# Altium PCB sitara_rev1.PcbDoc
Units mil, origin at the board's own origin, x right, y up, seen from the top; angles counter-clockwise.
Board outline 2000 x 2000 mil, 4 copper layers (Top Layer, Internal Plane 1, Internal Plane 2, Bottom Layer), stack 63.387 mil thick; 104 components, 76 nets, 374 pads, 326 vias.
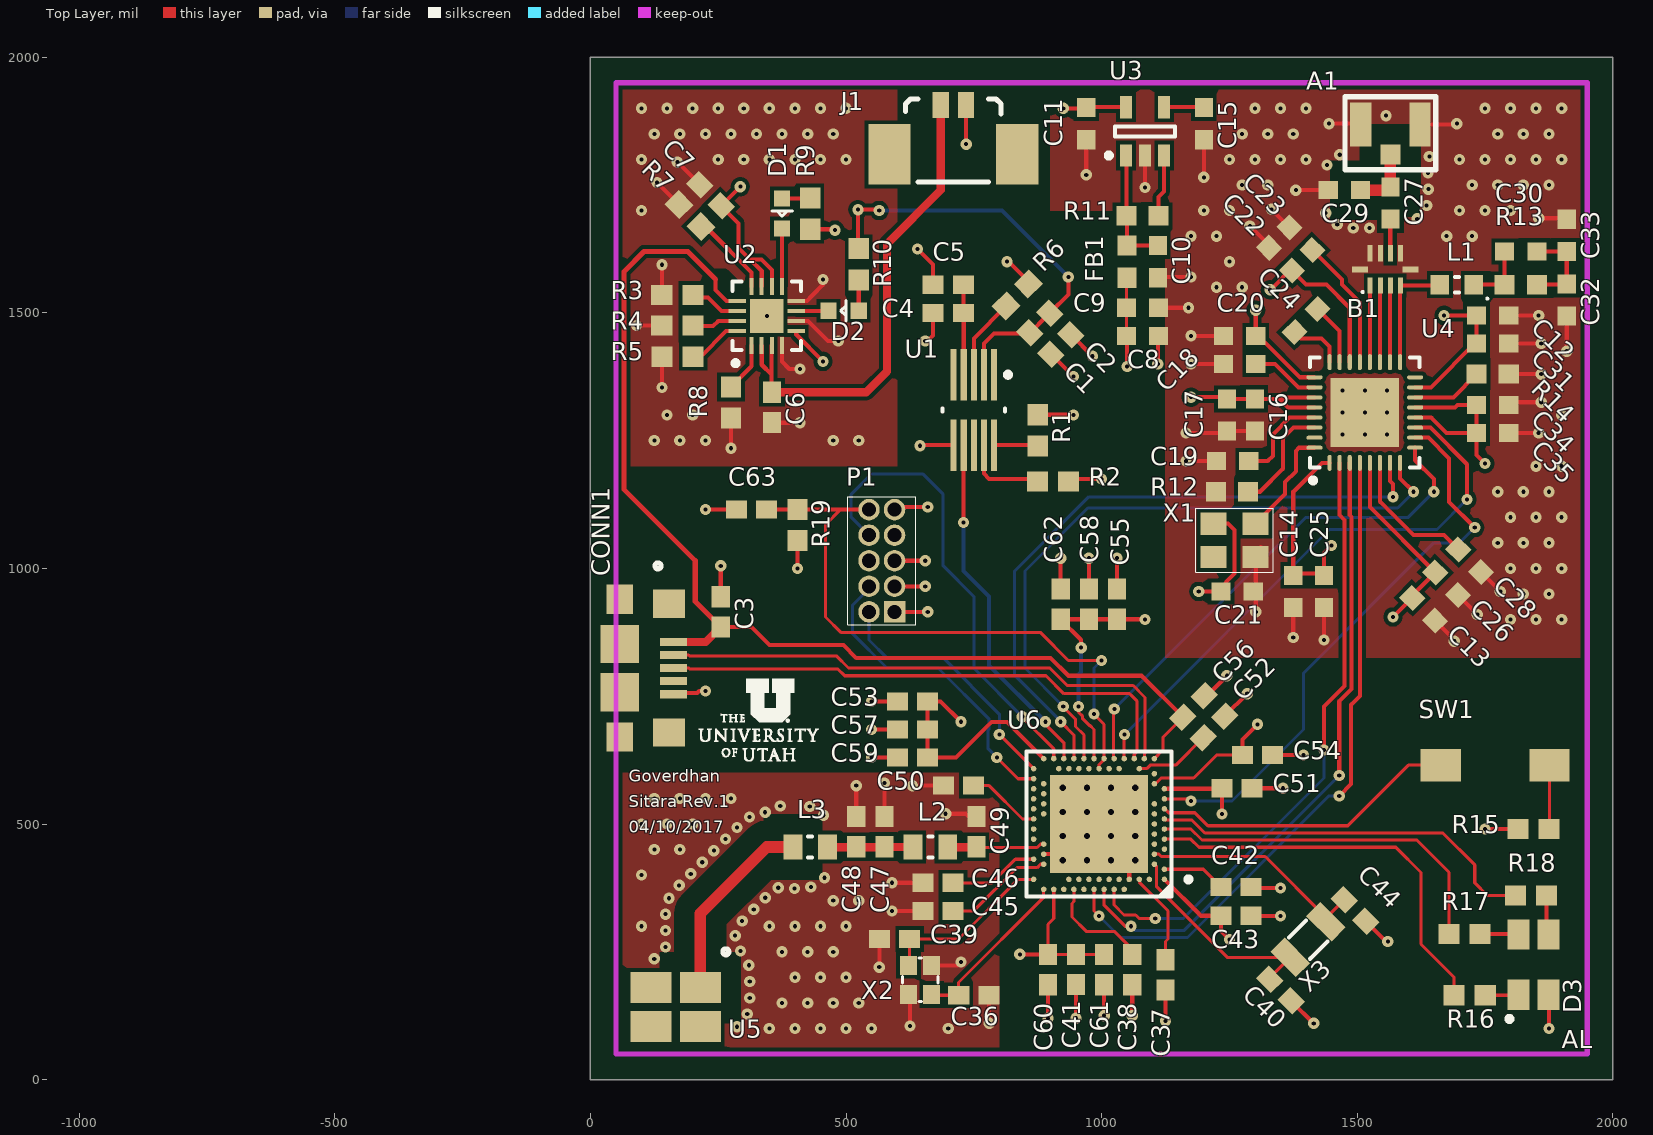
[diagram p0: Top Layer view]
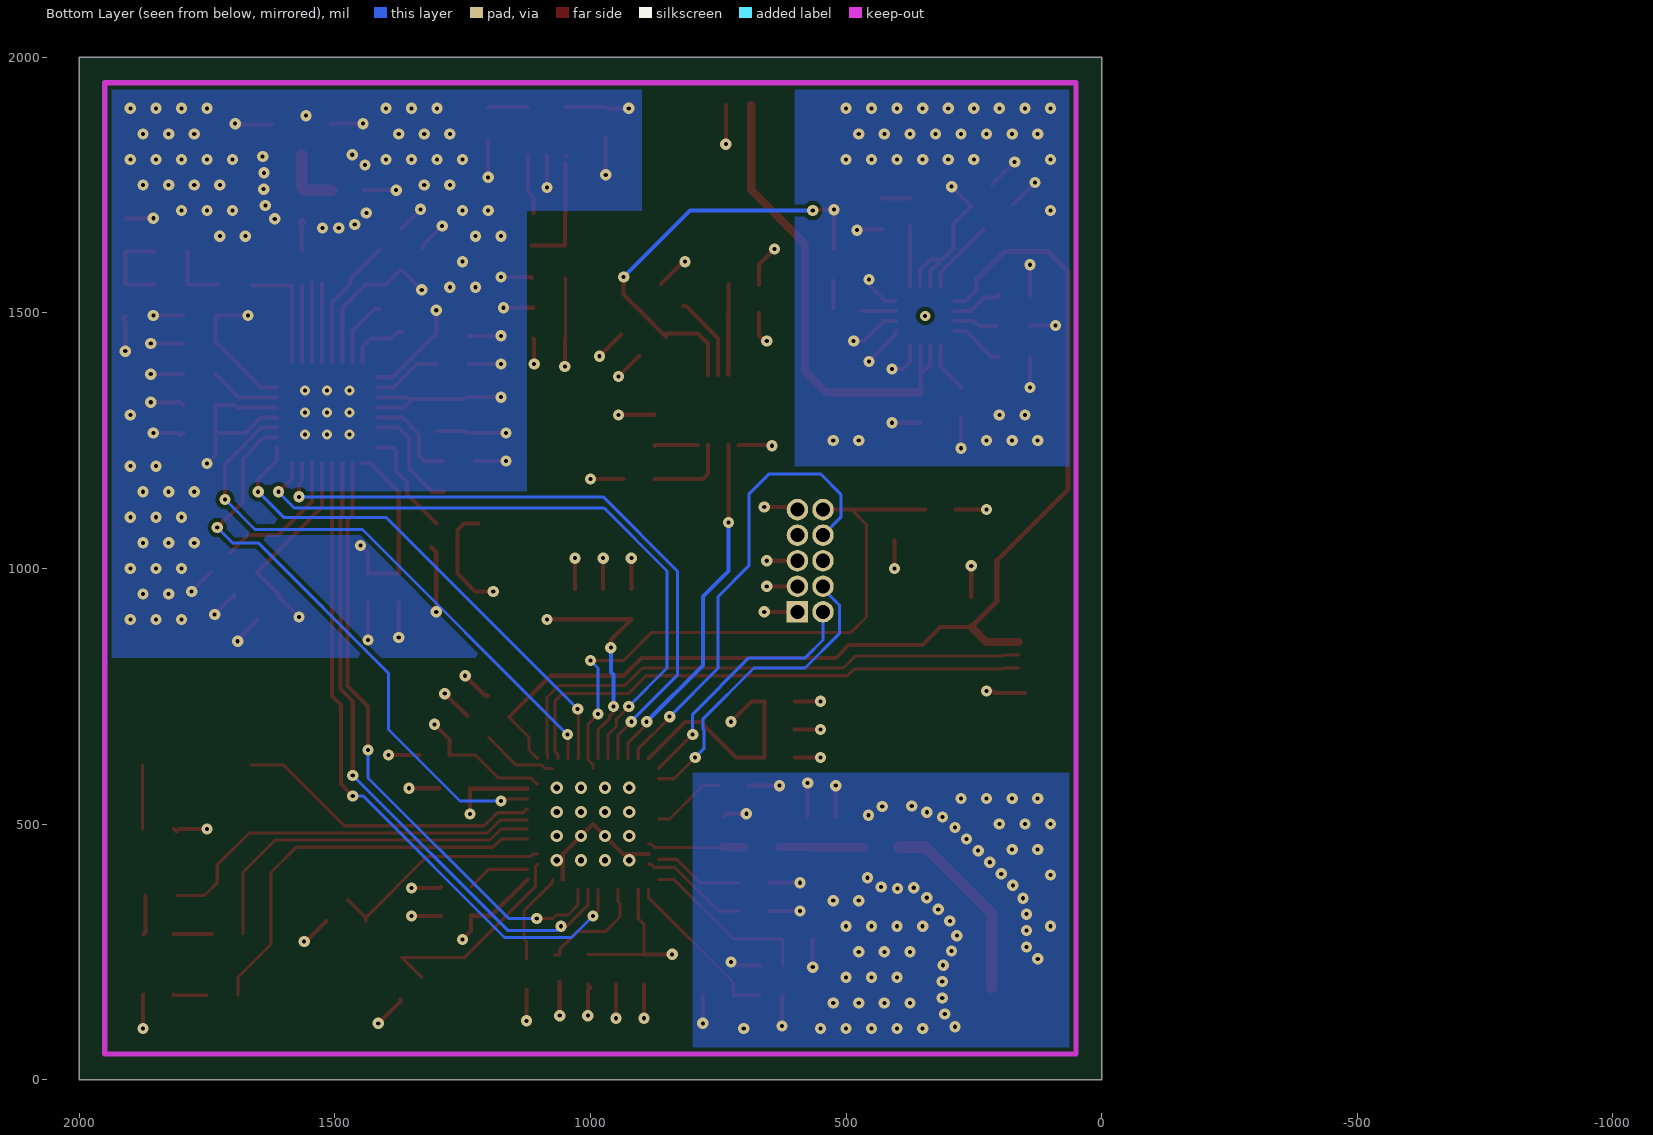
[diagram p1: Bottom Layer view, seen from below]
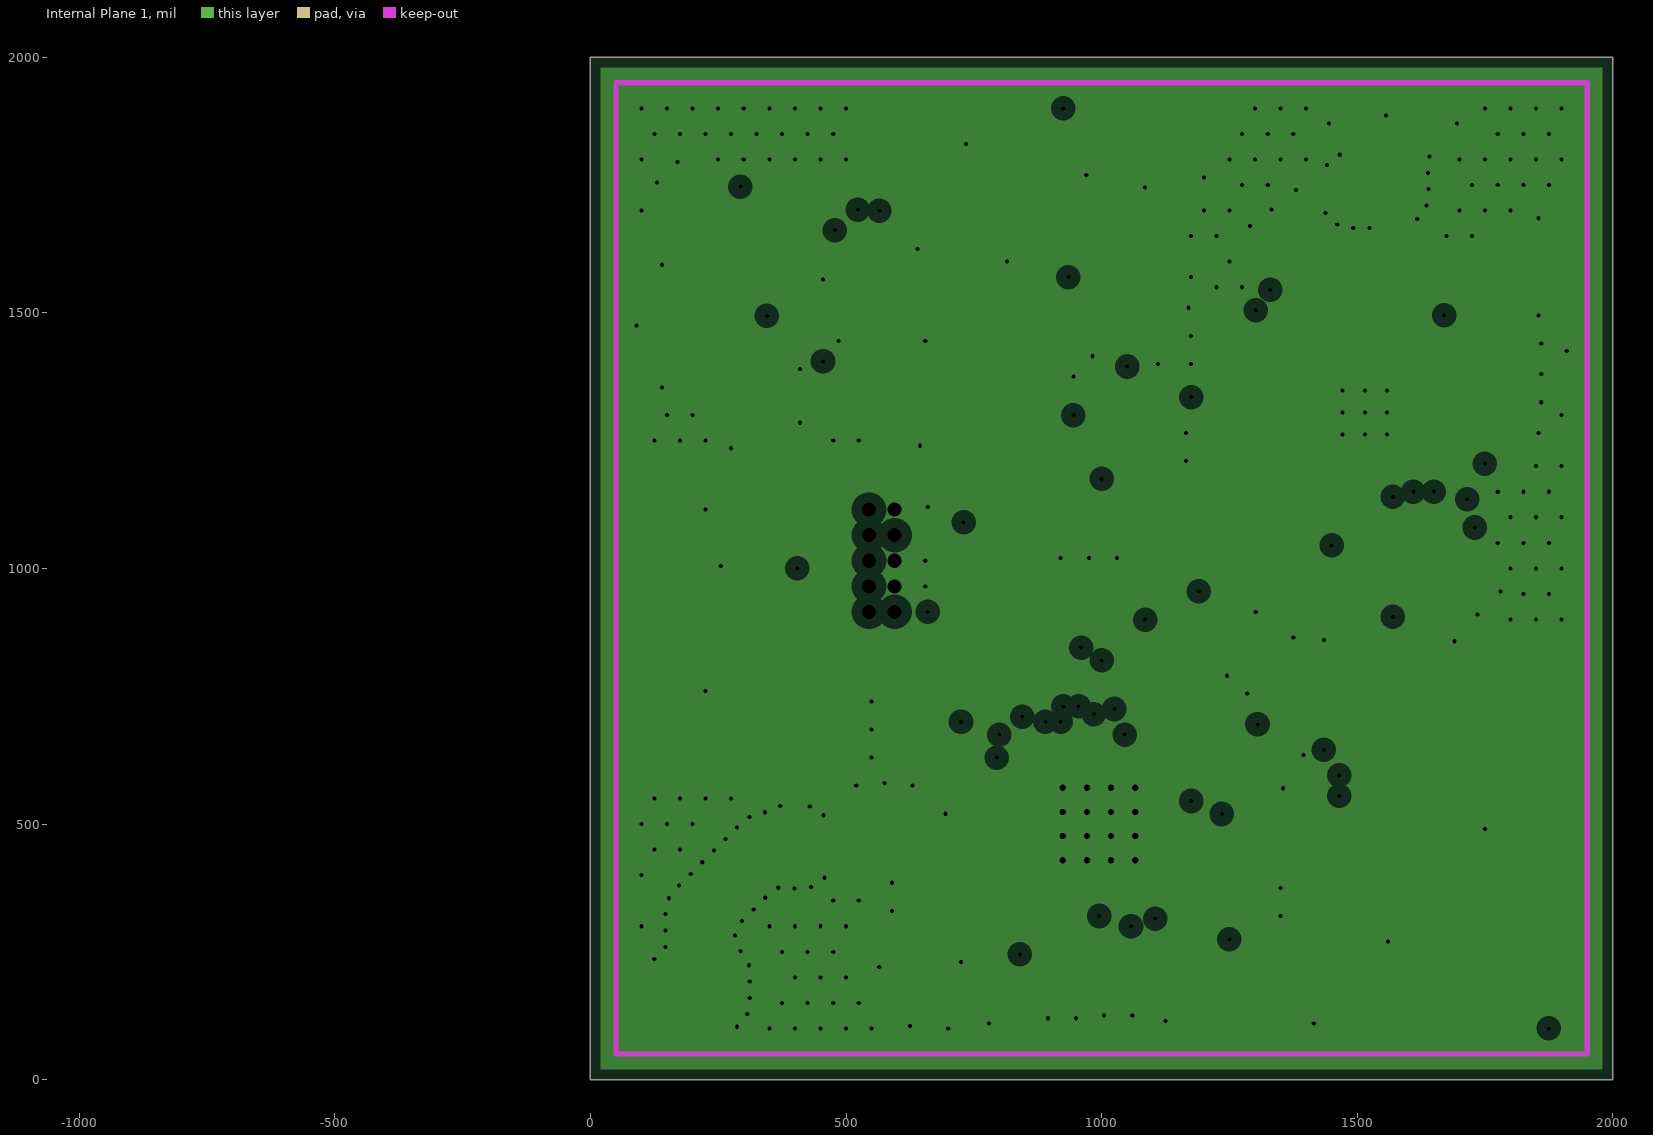
[diagram p2: Internal Plane 1, clearances drawn from the general rule]
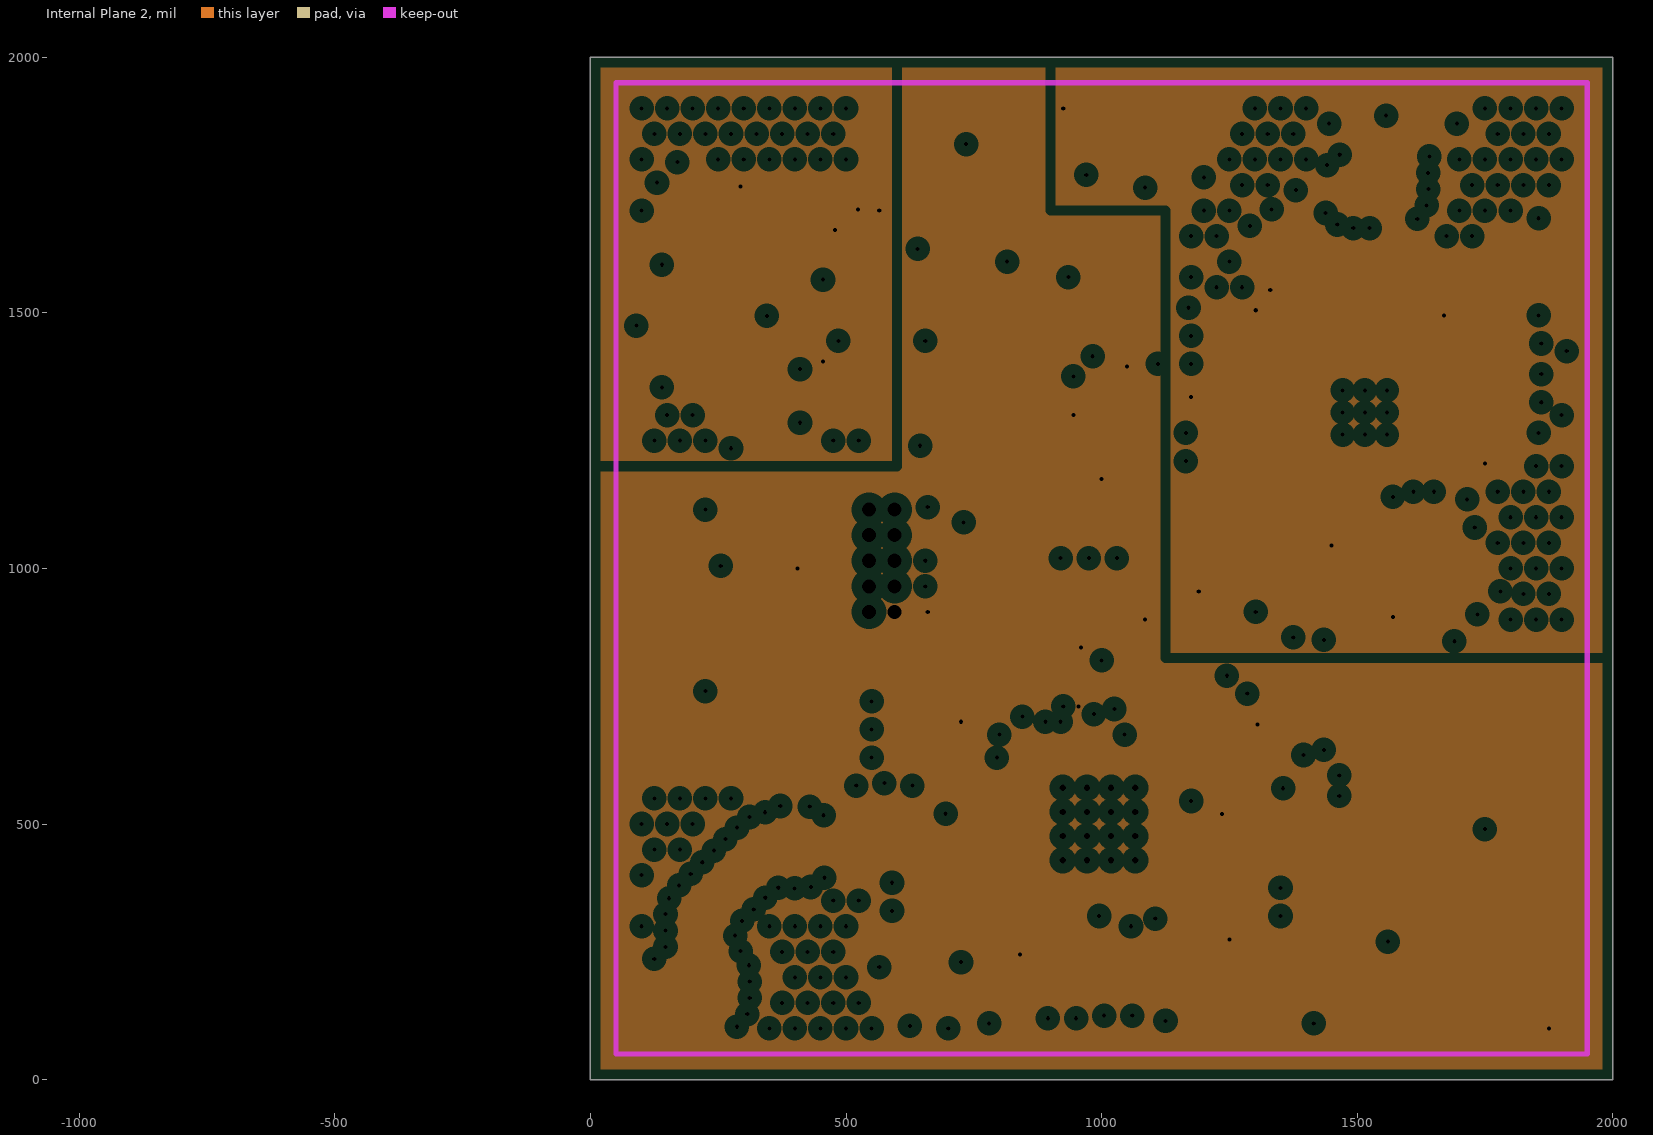
[diagram p3: Internal Plane 2, clearances drawn from the general rule]

## Layer stack, top to bottom
Top Solder: solder mask 0.039, Solder Resist, Dk 3.5
Top Layer: signal copper 1.378
Dielectric1: prepreg 14.961, ML 4, Dk 4.2
Internal Plane 1: plane copper 1.378, net GND
Dielectric2: prepreg 27.953, ML 4, Dk 4.2
Internal Plane 2: plane copper 1.378, net VDD
Dielectric3: prepreg 14.961, ML 4, Dk 4.2
Bottom Layer: signal copper 1.378
Bottom Solder: solder mask 0.039, Solder Resist, Dk 3.5

## Board outline
0,0 2000,0 2000,2000 0,2000

## Design rules (kind name [scope] priority, off if disabled: settings)
Clearance Shielding [InPolygon vs InNetClass('RF')] p1: gap=40 ignorepadtopadclearanceinfootprint=FALSE except(0: Arc-Hole Track-Hole SMDPad-Hole THPad-Hole Via-Hole Fill-Hole Poly-Hole Region-Hole Text-Hole)
Clearance [All] p2: gap=8 ignorepadtopadclearanceinfootprint=FALSE except(0: Arc-Hole Track-Hole SMDPad-Hole THPad-Hole Via-Hole Fill-Hole Poly-Hole Region-Hole Text-Hole; 6: Arc-SMDPad Track-SMDPad SMDPad-SMDPad)
DiffPairsRouting [All] p1: maxlimit=10 minlimit=10 mostfreqgap=10 toplayer_minwidth=6 toplayer_maxwidth=15 toplayer_prefwidth=15 bottomlayer_minwidth=6 bottomlayer_maxwidth=15 bottomlayer_prefwidth=15 maxuncoupledlength=500
PlaneClearance [All] p1: clearance=20
PlaneConnect [All] p1: planeconnectstyle=Direct reliefexpansion=20 reliefentries=4 reliefconductorwidth=10 reliefairgap=10
PolygonConnect Stitch [IsPolygon vs InNet('GND')] p1: connectstyle=Direct reliefconductorwidth=10 reliefentries=4 polygonreliefangle="90 Angle" airgapwidth=10
PolygonConnect [All] p2: connectstyle=Relief reliefconductorwidth=10 reliefentries=4 polygonreliefangle="90 Angle" airgapwidth=10
RoutingVias [All] p1: holewidth=12 width=24 viastyle="Through Hole" minholewidth=5.91 minwidth=13.78 maxholewidth=12 maxwidth=24
SolderMaskExpansion [All] p1: expansion=4
Width Antenna [InNetClass('RF')] p1: maxlimit=22.84 minlimit=22.84 preferedwidth=22.84 impedancedriven=TRUE minimp=50.000000 maximp=50.000000 favimp=50.000000
Width [All] p2: maxlimit=40 minlimit=4 preferedwidth=16 bottomlayer_minwidth=6 minimp=50.000000 maximp=50.000000 favimp=50.000000
27 further rules are at their usual default settings.

## Classes and differential pairs
component class _Block_level_sheet: U5
component class U_BLE_USB_nRF52840: C36 C37 C38 C39 C40 C41 C42 C43 C44 C45 C46 C47 C48 C49 C50 C51 C52 C53 C54 C55 C56 C57 C58 C59 C60 C61 C62 C63 D3 L2 L3 P1 R15 R16 R17 R18 R19 SW1 U6 X2 X3
component class U_Power_System: C1 C2 C3 C4 C5 C6 C7 CONN1 D1 D2 J1 R1 R2 R3 R4 R5 R6 R7 R8 R9 R10 U1 U2
component class U_RF: A1 B1 C8 C9 C10 C11 C12 C13 C14 C15 C16 C17 C18 C19 C20 C21 C22 C23 C24 C25 C26 C27 C28 C29 C30 C31 C32 C33 C34 C35 FB1 L1 R11 R12 R13 R14 U3 U4 X1
net class RF: ANT NetA1_1
differential pair D1: +D1_P -D1_N

## Components (designator, comment, footprint, x,y, rotation, side; value= is the part's Value field where it differs from the comment)
A1 "U.FL-R-SMT(01)" U.FL-R-SMT-1 1565.04,1868.5 r0 top
B1 "0900PC15J0013" 0900PC15J0013 1555,1585 r90 top
C1 "4.7uF" 0603_Cap 880,1440 r135 top
C2 "0.1uF" 0603_Cap 919.14,1478.28 r135 top
C3 "1uF" 0603_Cap 255,915 r270 top
C4 "10uF" 0603_Cap 700,1500 r0 top
C5 "0.1uF" 0603_Cap 700,1555 r180 top
C6 "4.7uF" 0603_Cap 355,1315 r90 top
C7 "4.7uF" 0603_Cap 235,1730 r315 top
C8 "GRM188R60J106ME47D" "CAPC1608X08N (0603)" 1080,1455 r180 top
C9 "GRM188R61A105KA61D" "CAPC1608X08N (0603)" 1080,1510 r180 top
C10 "GRM188F51A225ZE01D" "CAPC1608X08N (0603)" 1110,1600 r90 top
C11 "GRM188R61A105KA61D" "CAPC1608X08N (0603)" 970,1870 r90 top
C12 "GRM033R60J104KE19D" "CAPC1608X08N (0603)" 1765,1495 r180 top
C13 "GRM033R60J104KE19D" "CAPC1608X08N (0603)" 1630,920 r135 top
C14 "GRM188R60J106ME47D" "CAPC1608X08N (0603)" 1375,955 r90 top
C15 "GRM1885C1H102JA01D" "CAPC1608X08N (0603)" 1200,1870 r90 top
C16 "GCM188R71H473KA55D" "CAPC1608X08N (0603)" 1300,1300 r270 top
C17 "GCM188R71H473KA55D" "CAPC1608X08N (0603)" 1245,1300 r270 top
C18 "GCM188R71H473KA55D" "CAPC1608X08N (0603)" 1270,1400 r0 top
C19 "GCM188R71H473KA55D" "CAPC1608X08N (0603)" 1256.5,1210 r180 top
C20 "GCM188R71H473KA55D" "CAPC1608X08N (0603)" 1270,1455 r0 top
C21 "GRM188R71H103MA01D" "CAPC1608X08N (0603)" 1265.2,954.8 r180 top
C22 "GCM188R71H473KA55D" "CAPC1608X08N (0603)" 1350,1605 r315 top
C23 "GRM188R71H103MA01D" "CAPC1608X08N (0603)" 1390,1645 r135 top
C24 "GRM1885C1H152JA01D" "CAPC1608X08N (0603)" 1400,1485 r225 top
C25 "GCM188R71H473KA55D" "CAPC1608X08N (0603)" 1435,955 r90 top
C26 "GCM188R71H473KA55D" "CAPC1608X08N (0603)" 1675,970 r135 top
C27 "C_TBD" "CAPC1608X08N (0603)" 1565,1715 r90 top
C28 "GRM188R71E224KA88D" "CAPC1608X08N (0603)" 1720,1015 r135 top
C29 "C_TBD" "CAPC1608X08N (0603)" 1475,1740 r0 top
C30 "GRM1885C1H330JA01D" "CAPC1608X08N (0603)" 1820,1620 r180 top
C31 "GCM188R71H473KA55D" "CAPC1608X08N (0603)" 1765,1440 r0 top
C32 "GRM188R71H103MA01D" "CAPC1608X08N (0603)" 1910,1525 r90 top
C33 "GQM1885C1H101JB01D" "CAPC1608X08N (0603)" 1910,1651.5 r270 top
C34 "GCM188R71H473KA55D" "CAPC1608X08N (0603)" 1765,1320 r0 top
C35 "GCM188R71H473KA55D" "CAPC1608X08N (0603)" 1765,1265 r0 top
C36 "12pF" 0603_Cap 750,165 r0 top
C37 "1uF" 0603_Cap 1125,205 r90 top
C38 "0.1uF" 0603_Cap 1060,215 r270 top
C39 "12pF" 0603_Cap 595,275 r180 top
C40 "12pF" 0603_Cap 1350,175 r135 top
C41 "0.1uF" 0603_Cap 950,215.47 r90 top
C42 "0.1uF" 0603_Cap 1262.93,377.07 r180 top
C43 "1uF" 0603_Cap 1262.93,320.5 r180 top
C44 "12pF" 0603_Cap 1495.55,330.87 r135 top
C45 "100pF" 0603_Cap 680,330 r180 top
C46 "0.1uF" 0603_Cap 680,385 r0 top
C47 "0.5pF" 0603_Cap 575,485 r270 top
C48 "1.3pF" 0603_Cap 520,485 r270 top
C49 "0.8pF" 0603_Cap 755,485 r270 top
C50 "0.1uF" 0603_Cap 720,575 r180 top
C51 "4.7uF" 0603_Cap 1265,570 r180 top
C52 "4.7uF" 0603_Cap 1220,690 r225 top
C53 "0.1uF" 0603_Cap 630,740 r0 top
C54 "0.1uF" 0603_Cap 1305,635 r180 top
C55 "1uF" 0603_Cap 1030,930 r270 top
C56 "4.7uF" 0603_Cap 1180,730 r225 top
C57 "10uF" 0603_Cap 630,685 r0 top
C58 "10uF" 0603_Cap 975,930 r270 top
C59 "1uF" 0603_Cap 630,630 r0 top
C60 "1uF" 0603_Cap 895,215 r90 top
C61 "0.1uF" 0603_Cap 1005,215 r90 top
C62 "0.1uF" 0603_Cap 920,930 r270 top
C63 "0.1uF" 0603_Cap 315,1115 r0 top
CONN1 "10118193-0001LF" USB_MICRO_B 110,805 r270 top
D1 "LTST-C191KFKT" 0603_LED 375,1723.98 r270 top
D2 "LTST-C191KFKT" 0603_LED 525,1503.98 r180 top
D3 "CLV1A-FKB-CJ1M1F1BB7R4S3" "CREE LV1" 1845,225 r90 top
FB1 "BLM18BD221SN1D" "RESC1608X06N (0603)" 1050,1600 r90 top
J1 "0533980271" 53398-0271 710,1810 r0 top
L1 "LQG18HN10NJ00D" INDC1608X08N 1695,1555 r180 top
L2 "3.3nH" 0603_IND 665,455 r180 top
L3 "1.8nH" 0603_IND 430,455 r180 top
P1 "M50-3500542" M50 570,1015 r90 top
R1 "10K" 0603_RES 875,1270 r90 top
R2 "10K" 0603_RES 905,1170 r0 top
R3 "56.2K" 0603_RES 170,1535 r0 top
R4 "3.57K" 0603_RES 170,1475 r0 top
R5 "4.32K" 0603_RES 170.51,1413.98 r0 top
R6 "10K" 0603_RES 835,1535 r225 top
R7 "2.94K" 0603_RES 195,1690 r135 top
R8 "10K" 0603_RES 275,1324.49 r90 top
R9 "1.5K" 0603_RES 430,1693.98 r270 top
R10 "1.5K" 0603_RES 525,1595 r90 top
R11 "RC0603FR-0710KL" "RESC1608X06N (0603)" 1080,1690 r180 top
R12 "MCR03ERTJ000" "RESC1608X06N (0603)" 1255,1150 r0 top
R13 "RC0603FR-0710RL" "RESC1608X06N (0603)" 1820,1555 r180 top
R14 "MCR03ERTJ563" "RESC1608X06N (0603)" 1765,1380 r180 top
R15 "3.57K" 0603_RES 1845,490 r0 top
R16 "330" 0603_RES 1720,165 r0 top
R17 "330" 0603_RES 1710,285 r180 top
R18 "330" 0603_RES 1840,360 r180 top
R19 "10K" 0603_RES 405,1085 r90 top
SW1 "EVQ-PE105K" EVQ-PE105K 1770,615 r180 top
U1 "TPS2147IDGQG4" MSOP_10_TPS2147 750,1310 r270 top
U2 "BQ24232HARGTT" QFN_16_BQ24232 345,1493.98 r90 top
U3 "FAN2500S30X" SOT95P280X145-5N 1085,1855 r90 top
U4 "CC1200RHBR" S-PVQFN-N32 1515,1305 r90 top
U5 "2.4GHz" ANT_molex_2_4_GHz 215,180 r270 top
U6 "nRF52840-QIAA" AQFN50P700X700X85_HS-74N 995,500 r180 top
X1 "ASE-40.000MHZ-L-C-T" 3.2x2.5x1.2mmXTAL 1260,1055 r0 top
X2 "32MHz" BT-XTAL_2016 645,195 r270 top
X3 "32.768kHz" XTAL_3215 1403.96,273.96 r45 top

## Footprints (in the part's own frame and the unit in brackets; to place one, negate y for a bottom-side part, rotate by r counter-clockwise, add the part's x,y. Pads: shape width x height; smd on the part's side, far side on the other; paste and mask are expansions set on the pad)
3.2x2.5x1.2mmXTAL [mm]
  rect 1.3x1.1 smd: 1(-1.05,-0.825) 2(1.05,-0.825) 3(1.05,0.825) 4(-1.05,0.825)
  round 0.5 on Top Overlay: 5(-2.25,-1.25)
  silkscreen extent -1.92,-1.6 1.92,1.6, body extent -1.6,-1.25 1.6,1.25, height 0.91
0603_Cap [mm] "Chip Capacitor, 2-Leads, Body 1.60x0.80mm, IPC Medium Density"
  rect 1.05x0.9 smd: 1(-0.75,0) 2(0.75,0)
  body extent -0.85,-0.45 0.85,0.45, height 0.9
0603_IND [mm] "Chip Inductor, 2-Leads, Body 1.60x1.05mm, IPC Medium Density"
  rect 0.93x1.25 smd: 1(-0.86,0) 2(0.86,0)
  silkscreen extent -0.1,-0.53 0.1,0.53, body extent -0.9,-0.63 0.9,0.63, height 1.25
0603_LED [mm]
  rect 0.8x0.8 smd: 1(0,0) 2(1.5,0)
  silkscreen extent 0.63,-0.51 0.89,0.51
0603_RES [mm] "Chip Resistor, 2-Leads, Body 1.55x0.80mm, IPC Medium Density"
  rect 1.05x1 smd: 1(-0.775,0) 2(0.775,0)
  body extent -0.85,-0.48 0.85,0.47, height 0.55
0900PC15J0013 [mm]
  rect 0.8x0.25 smd: 1(-0.8,0.75) 2(-0.8,0.25) 3(-0.8,-0.25) 4(-0.8,-0.75) 6(0.8,-0.75) 7(0.8,-0.25) 8(0.8,0.25) 9(0.8,0.75)
  rect 0.3x0.8 smd: 5(0,-1.25) 10(0,1.25)
  silkscreen extent -1.17,1.07 -1.08,1.17, body extent -0.72,-1.1 0.72,1.1, height 1
53398-0271 [mm] "1.25mm Pitch PicoBlade™ Header, Surface Mount, Vertical, Lead-Free, 2 Circuits"
  rect 0.8x1.3 smd: 1(-0.625,2.45) 2(0.625,2.45)
  rect 2.1x3 smd: 3(-3.175,0) 4(3.175,0)
  silkscreen extent -2.37,-1.38 2.37,2.75, body extent -3.83,-1.33 3.82,2.87, height 4.7
ANT_molex_2_4_GHz [mm] "molex antenna footprint"
  rect 1.54x2.04 smd: 1(0,0) 2(1.93,0) 3(1.93,-2.44) 4(0,-2.44)
  silkscreen extent -1.93,1.12 -1.63,1.42
AQFN50P700X700X85_HS-74N [mm]
  rect 4.85x4.85 smd mask+0.05: 74(0,0)
  round 0.275 smd paste+0.012 mask+0.05: A8(-1.25,3.25) A10(-0.75,3.25) A12(-0.25,3.25) A14(0.25,3.25) A16(0.75,3.25) A18(1.25,3.25) A20(1.75,3.25) A22(2.25,3.25) A23(2.75,3.25) AA24(3.25,-2.25) AB2(-2.75,-2.5) AC5(-2,-2.75) AC9(-1,-2.75) AC11(-0.5,-2.75) AC13(0,-2.75) AC15(0.5,-2.75) AC17(1,-2.75) AC19(1.5,-2.75) AC21(2,-2.75) AC24(3.25,-2.75) AD2(-2.75,-3.25) AD4(-2.25,-3.25) AD6(-1.75,-3.25) AD8(-1.25,-3.25) AD10(-0.75,-3.25) AD12(-0.25,-3.25) AD14(0.25,-3.25) AD16(0.75,-3.25) AD18(1.25,-3.25) AD20(1.75,-3.25) AD22(2.25,-3.25) AD23(2.75,-3.25) B1(-3.25,2.75) B3(-2.5,2.75) B5(-2,2.75) B7(-1.5,2.75) B9(-1,2.75) B11(-0.5,2.75) B13(0,2.75) B15(0.5,2.75) B17(1,2.75) B19(1.5,2.75) B24(3.25,2.75) C1(-3.25,2.25) D2(-2.75,2) D23(2.75,2) E24(3.25,1.75) F2(-2.75,1.5) F23(2.75,1.5) G1(-3.25,1.25) H2(-2.75,1) H23(2.75,1) J1(-3.25,0.75) J24(3.25,0.75) K2(-2.75,0.5) L1(-3.25,0.25) L24(3.25,0.25) M2(-2.75,0) N1(-3.25,-0.25) N24(3.25,-0.25) P2(-2.75,-0.5) P23(2.75,-0.5) R1(-3.25,-0.75) R24(3.25,-0.75) T2(-2.75,-1) T23(2.75,-1) U1(-3.25,-1.25) U24(3.25,-1.25) V23(2.75,-1.5) W1(-3.25,-1.75) W24(3.25,-1.75) Y2(-2.75,-2) Y23(2.75,-2)
  silkscreen extent -4.57,-3.6 3.6,3.6, body extent -3.55,-3.55 3.55,3.55, height 0.85
BT-XTAL_2016 [mm]
  rect 0.95x0.85 smd: 1(-0.725,-0.575) 2(0.725,-0.575) 3(0.725,0.575) 4(-0.725,0.575)
  silkscreen extent -1.08,-0.88 1.08,0.88
"CAPC1608X08N (0603)" [mm] "Chip Capacitor, 2-Leads, Body 1.60x0.80mm, IPC Medium Density"
  rect 0.95x0.9 smd: 1(-0.8,0) 2(0.8,0)
  body extent -0.85,-0.45 0.85,0.45, height 0.8
"CREE LV1" [mm]
  rect 1.5x1.1 smd: 1(-1.5,0.75) 2(-1.5,-0.75) 3(1.5,-0.75) 4(1.5,0.75)
  silkscreen extent -2.82,1.07 -2.58,1.32, body extent -1.75,-1.4 1.75,1.4, height 1.9
EVQ-PE105K [mm]
  rect 2x1.6 smd: 1(-2.7,0) 2(2.7,0)
  body extent -3.6,-1.75 3.6,1.75, height 5
INDC1608X08N [mm] "Chip Inductor, 2-Leads, Body 1.60x0.80mm, IPC Medium Density"
  rect 0.91x0.96 smd: 1(-0.845,0) 2(0.845,0)
  silkscreen extent -1.56,-0.38 0.1,0.74, body extent -0.87,-0.48 0.87,0.47, height 0.8
M50 [mil]
  rect 42x42 hole 27.56: 1(-100,-25)
  round 42 hole 27.56: 2(-100,25) 3(-50,-25) 4(-50,25) 5(0,-25) 6(0,25) 7(50,-25) 8(50,25) 9(100,-25) 10(100,25)
  silkscreen extent -125,-67 125,67, body extent -125,-67 125,67, height 157
MSOP_10_TPS2147 [mm] "MSOP, 10-Leads, Body 3.00x3.00mm, Pitch 0.50mm, IPC Medium Density"
  rect 2.55x0.3 smd: 1(-1.75,1) 2(-1.75,0.5) 3(-1.75,0) 4(-1.75,-0.5) 5(-1.75,-1) 6(1.75,-1) 7(1.75,-0.5) 8(1.75,0) 9(1.75,0.5) 10(1.75,1)
  silkscreen extent -1.87,-1.55 0.08,1.83, body extent -1.55,-1.55 1.55,1.55, height 1.1
QFN_16_BQ24232 [mm] "QFN, 16-Leads, Body 3.00x3.00mm, Pitch 0.50mm, Thermal Pad 1.68x1.68mm, IPC Medium Density"
  rect 0.85x0.2 smd: 1(-1.465,0.75) 2(-1.465,0.25) 3(-1.465,-0.25) 4(-1.465,-0.75) 9(1.465,-0.75) 10(1.465,-0.25) 11(1.465,0.25) 12(1.465,0.75)
  rect 0.2x0.85 smd: 5(-0.75,-1.465) 6(-0.25,-1.465) 7(0.25,-1.465) 8(0.75,-1.465) 13(0.75,1.465) 14(0.25,1.465) 15(-0.25,1.465) 16(-0.75,1.465)
  rect 1.68x1.68 smd: 17(0,0)
  silkscreen extent -2.47,-1.7 1.7,1.7, body extent -1.55,-1.55 1.55,1.55, height 1
"RESC1608X06N (0603)" [mm] "Chip Resistor, 2-Leads, Body 1.60x0.80mm, IPC Medium Density"
  rect 1x0.95 smd: 1(-0.8,0) 2(0.8,0)
  body extent -0.85,-0.45 0.85,0.45, height 0.55
S-PVQFN-N32 [mm] "QFN, 32-Leads, Body 5.00x5.00mm, Pitch 0.50mm, Thermal Pad 3.45x3.40mm, IPC Medium Density"
  oval 0.8x0.2 smd: 1(-2.5,1.75) 2(-2.5,1.25) 3(-2.5,0.75) 4(-2.5,0.25) 5(-2.5,-0.25) 6(-2.5,-0.75) 7(-2.5,-1.25) 8(-2.5,-1.75) 17(2.5,-1.75) 18(2.5,-1.25) 19(2.5,-0.75) 20(2.5,-0.25) 21(2.5,0.25) 22(2.5,0.75) 23(2.5,1.25) 24(2.5,1.75)
  oval 0.2x0.8 smd: 9(-1.75,-2.5) 10(-1.25,-2.5) 11(-0.75,-2.5) 12(-0.25,-2.5) 13(0.25,-2.5) 14(0.75,-2.5) 15(1.25,-2.5) 16(1.75,-2.5) 25(1.75,2.5) 26(1.25,2.5) 27(0.75,2.5) 28(0.25,2.5) 29(-0.25,2.5) 30(-0.75,2.5) 31(-1.25,2.5) 32(-1.75,2.5)
  rect 3.45x3.4 smd: 33(0,0)
  silkscreen extent -3.5,-2.73 2.73,2.73, body extent -2.58,-2.57 2.57,2.58, height 1
SOT95P280X145-5N [mm] "SOT23, 5-Leads, Body 2.90x2.80mm, Pitch 0.95mm, IPC Medium Density"
  rect 1.1x0.6 smd: 1(-1.2,0.95) 2(-1.2,0) 3(-1.2,-0.95) 4(1.2,-0.95) 5(1.2,0.95)
  silkscreen extent -1.32,-1.5 0.25,1.92, body extent -0.85,-1.5 0.85,1.5, height 1.45
U.FL-R-SMT-1 [mm] "U.FL-R-SMT-1"
  rect 1x1 smd: 1(0,-1.5)
  rect 1.05x2.2 smd: 2(-1.475,0) 3(1.475,0)
  silkscreen extent -2.25,-2.25 2.25,1.38, body extent -1.5,-1.55 1.5,1.55, height 1.26
USB_MICRO_B [mm] "USB_Micro_B_A97800CT-ND"
  rect 1.45x1.3 smd: 0(-3.425,-1.338) 0(3.425,-1.338)
  rect 1.4x1.6 smd: 0(-3.2,1.112) 0(3.2,1.112)
  rect 1.9x1.9 smd: 0(-1.2,-1.338) 0(1.2,-1.338)
  rect 0.4x1.35 smd: 1(-1.3,1.338) 2(-0.65,1.338) 3(0,1.338) 4(0.65,1.338) 5(1.3,1.338)
  silkscreen extent -5.23,0.42 -4.93,0.72, body extent -3.99,-3.93 3.99,1.5, height 2.72
XTAL_3215 [mm]
  rect 1x1.8 smd: 1(-1.25,0) 2(1.25,0)
  silkscreen extent -0.6,-0.75 0.6,0.75, body extent -1.6,-0.75 1.6,0.75, height 0.81

## Part data
A1: "CONN UMC JACK STR 50 OHM SMD"
B1: "TI CC1120 1121 BALUN FILTER IPC"
C1 C6 C7 C51 C52 C56: library part JMK107BJ475MAHT
C2 C5 C38 C41 C42 C46 C50 C53 C54 C61 C62 C63: library part 0603YC104KAT4A, "CAP CER 0.1UF 16V X7R 0603"
C3 C37 C43 C55 C59 C60: library part JMK107C6105KA-T, "CAP CER 1uF SMD"
C4 C57 C58: library part EMK107BC6106MA-T, "CAP CER 10uF"
C8 C14: "CAP CER 10UF 6.3V 20% X5R 0603"
C9 C11: "CAP CER 1UF 10V 10% X5R 0603"
C10: "CAP CER 2.2UF 10V Y5V 0603"
C12 C13: "CAP CER 0.1UF 6.3V 10% X5R 0201"
C15: "CAP CER 1000PF 50V 5% NP0 0603"
C16 C17 C18 C19 C20 C22 C25 C26 C31 C34 C35: "CAP CER 0.047UF 50V 10% X7R 0603"
C21 C23 C32: "CAP CER 10000PF 50V 20% X7R 0603"
C24: "CAP CER 1500PF 50V 5% NP0 0603"
C28: "CAP CER 0.22UF 25V 10% X7R 0603"
C30: "CAP CER 33PF 50V NP0 0603"
C33: "CAP CER 100PF 50V 5% NP0 0603"
C36 C39 C40 C44: library part 251R14S120GV4T, "CAP CER 12PF 250V NP0 0603"
C45: library part C1608C0G1H101J080AA, "CAP CER 100PF 50V C0G 0603"
C47: library part 251R14S0R5BV4T, "CAP CER 0.5PF 250V NP0 0603"
C48: library part 251R14S1R3BV4T, "CAP CER 1.3PF 250V NP0 0603"
C49: library part 251R14S0R8BV4T, "CAP CER 0.8PF 250V NP0 0603"
CONN1: "CONN USB MICRO B RECPT SMT R/A"
D1 D2: "LED ORANGE CLEAR 0603 SMD"
D3: "LED RED/GREEN/BLUE PLCC4 SMD"
FB1: "FERRITE CHIP 220 OHM 200MA 0603"
J1: "CONN HEADER 2POS 1.25MM VERT SMD"
L1: "FIXED IND 10NH 400MA 300 MOHM"
L2: library part LQG18HN3N3S00D, "FIXED IND 3.3NH 500MA 150 MOHM"
L3: library part L-14C1N8SV4T, "FIXED IND 1.8NH 300MA 100 MOHM"
P1: "CONN HDR 1.27MM VERT AU 10POS"
R1 R2 R6 R8 R19: library part PHT0603Y1002BGT200, "RES SMD 10KOHM 0.1% 0.0375W 0603"
R3: library part ERA-3AEB5622V, "RES SMD 56.2KOHM 0.1% 1/10W 0603"
R4 R15: library part TNPW06033K57BEEA, "RES SMD 3.57KOHM 0.1% 1/10W 0603"
R5: library part ERA-3AEB4321V, "RES SMD 4.32KOHM 0.1% 1/10W 0603"
R7: library part ERA-3AEB2941V, "RES SMD 2.94KOHM 0.1% 1/10W 0603"
R9 R10: library part CRCW06031K50JNEA, "RES SMD 1.5K OHM 5% 1/10W 0603"
R11: "RES 10.0K OHM 1/10W 1% 0603 SMD"
R12: "RES 0.0 OHM 1/10W JUMP 0603 SMD"
R13: "RES SMD 10 OHM 1% 1/10W 0603"
R14: "RES 56K OHM 1/10W 5% 0603 SMD"
R16 R17 R18: library part RC0603JR-07330RL, "RES SMD 330 OHM 5% 1/10W 0603"
SW1: "SWITCH TACTILE SPST-NO 0.05A 12V"
U1: "IC 3.3V LDO/DUAL SWITCH 10-MSOP"
U2: "IC LI-ION CHARGE PWR MGMT 16VQFN"
U3: "IC REG LDO 3V 0.1A SOT23-5"
U4: "IC RF TXRX SNGL-CHIP LP 32-QFN"
U5: library part 0479480001, "ANTENNA 2.4GHZ 50 OHMS SMD"
U6: library part nRF52840_QIAA, "Multi-protocol Bluetooth Low Energy, IEEE 802.15.4, ANT and 2.4GHz proprietary system-on-chip"
X1: "OSC XO 40.0000MHZ LVCMOS SMD"
X2: "XTAL SMD 2016, 32MHz, Cl=8pF, Total Tol: ±40ppm"
X3: library part XTAL_SMD3215, "XTAL SMD 3215, 32.768kHz, Cl=9pF, Total Tol: ±50ppm"

## Via types
v1: diameter 22, hole 8, Top Layer to Bottom Layer, tented both sides, 298 vias
v2: diameter 24, hole 12, Top Layer to Bottom Layer, 16 vias
v3: diameter 19.68, hole 7.87, Top Layer to Bottom Layer, 10 vias
v4: diameter 22, hole 8, Top Layer to Bottom Layer, tented top, 2 vias

## Nets (pads, with @x,y where several pads share a name; then routed paths per layer and width w, separated by ;. In a path a pad name is that pad's centre, name@x,y a point inside that pad or via, vN(x,y) a via of type N, cw(c..) or ccw(c..) an arc to the next point about the centre after c; other vN are vias at no path point)
ANT: L3.2 U5.1 | length 380
  Top Layer w22.84: U5.1 215,325 345,455 L3.2
C\S\: U4.11 U6.AD8 | length 1108
  Top Layer w6: U6.AD8 1044.21,674.21 v1(1045,675)
  Top Layer w8: U4.11 1643.31,1275.47 1715,1203.79 v1(1715,1135)
  Bottom Layer w6: v1(1045,675) 1446,1076 1656,1076 v1(1715,1135)
D1_N: CONN1.2 U6.AD4 | length 1077
  Top Layer w6: CONN1.2 192.23,830.59 193.81,829.02 480.98,829.02 505,805 898.79,805 932.79,771 1061.63,771 1085,747.63 1085,637.78 1083.58,636.37 U6.AD4
D1_P: CONN1.3 U6.AD6 | length 1048
  Top Layer w6: CONN1.3 193.03,805 195,803.03 484.34,803.03 497.37,790 891.16,790 926.16,755 1055,755 1069,741 1069,641.47 1063.9,636.37 U6.AD6
GND: A1.2 A1.3 B1.5 B1.6 B1.8 B1.9 B1.10 C1.1 C2.1 C3.1 C4.1 C5.2 C6.1 C7.1 C8.1 C9.1 C10.1 C11.1 C12.1 C13.1 C14.1 C15.1 C16.2 C17.2 C18.1 C19.2 C20.1 C21.1 C22.1 C23.2 C25.1 C26.1 C28.1 C29.1 C31.2 C32.1 C33.1 C34.2 C35.2 C36.2 C37.1 C38.2 C39.2 C40.1 C41.1 C42.1 C43.1 C44.1 C45.2 C46.1 C47.1 C48.1 C49.1 C50.2 C51.1 C52.1 C53.1 C54.1 C55.1 C56.1 C57.1 C58.1 C59.1 C60.1 C61.1 C62.1 C63.1 CONN1.5 J1.2 P1.3 P1.5 P1.9 R3.1 R4.1 R5.1 R6.1 R7.2 R8.1 R12.1 R14.1 R15.1 U1.6 U2.4 U2.6 U2.8 U3.2 U4.33 U6.74 U6.B7 U6.F23 X1.2 X2.2 X2.4 | length 5490.8
  Top Layer w8: v1(90,1475) 138.98,1475 R4.1@140,1473.98 ; R3.1@139.49,1533.98 140,1534.49 140,1560 v1(140,1593.98) ; v1(140,1353.98) R5.1 ; CONN1.5@150,756.06 171.3,756.06 208.94,756.06 212.87,760 v1(225,760) ; v1(170,1795) C7.1 ; R7.2 v1(130.26,1754.74) ; v4(225,1115) C63.1 ; C3.1 v1(255,1005) ; v1(275,1235) R8.1 ; C6.1@355,1284.45 355.55,1285 v1(410,1285) ; U2.4 374.53,1404.45 388.98,1390 v1(410,1390) ; U2.8 423.53,1523.5 434,1533.98 ; U2.6@402.83,1483.98 U2.6 425.87,1484.13 465,1445 v1(485,1445) ; 429.6,1529.58 434,1533.98 ; v1(455,1565) 455,1554.98 434,1533.98 ; C48.1 v1(520,575) ; v1(550,630) C59.1 ; v1(550,685) C57.1 ; v1(550,740) C53.1 ; v1(565,220) 565.47,220.47 C39.2 ; C47.1 v1(575,580) ; v1(590,330) C45.2 ; v1(590,385) C46.1 ; P1.3 v1(655,965) ; P1.5 v1(655,1015) ; P1.9 600,1120 v1(660,1120) ; X2.2 625,163.82 v1(625,105) ; v1(630,575) C50.2 ; v1(640,1625) 670.47,1594.53 C5.2 ; v1(645,1240) 646.1,1241.1 U1.6 ; v1(655,1445) 660,1445 670.47,1455.47 C4.1 ; X2.4 718.54,223.54 v1(725,230) ; v1(695,520) 734.53,520 C49.1@740,514.53 ; J1.2 734.61,1830.39 v1(735,1830) ; C36.2 779.53,110.47 v1(780,110) ; v1(815,1600) 818.15,1600 R6.1@861.58,1556.58 ; U6.F23 935.94,440.94 v2(971.38,476.38) U6.74 1054.06,440.94 U6.B7 ; v1(895,120) C60.1 ; C1.1@904.06,1416.44 v1(945,1375.5) ; C62.1 v1(920,1020) ; C2.1 v1(982.43,1415) ; v1(950,120) C41.1@950,185.47 ; v1(970,1770) C11.1 C11.1@970,1843.5 ; C58.1 v1(975,1020) ; v1(1005,125) 1005,175.47 1000,180.47 C61.1 ; C55.1 v1(1030,1020) ; v1(1060,125) C38.2 C38.2@1060,190.94 ; v1(1085,1745) U3.2 ; v1(1110,1400) 1110,1448.5 C8.1@1111.5,1450 ; C9.1 v1(1170,1510) ; C10.1@1115,1568.5 1116.5,1570 v1(1175,1570) ; v1(1125,115) C37.1 ; v1(1165,1210) C19.2 ; v1(1165,1265) 1241.5,1265 C17.2 C16.2 ; v1(1175,1400) C18.1 ; v1(1175,1455) C20.1 ; v1(1200,1765) C15.1 ; C56.1 1205.88,750.88 v1(1245,790) ; C52.1 v1(1285,755) ; v1(1290,1670) 1327.73,1632.27 C22.1 ; C43.1 1292.96,320 v1(1350,320) ; C42.1 1294.53,375 v1(1350,375) ; C51.1@1295,570 v1(1355,570) ; v1(1301.5,915) 1301.5,1031.54 X1.2@1311.34,1041.38 ; v1(1332.5,1702.5) C23.2 C23.2@1370.46,1664.54 ; C54.1 v1(1395,635) ; C40.1@1371.81,157.63 1371.81,153.19 v1(1415,110) ; v1(1375,865) C14.1 C14.1@1375,933.5 ; v1(1380,1740) 1442.01,1740 C29.1@1443.5,1738.5 ; v1(1435,860) C25.1 C25.1@1435,933.5 ; v1(1445,1870) 1505.47,1870 A1.2 ; C44.1 1556.42,270 v1(1560,270) ; A1.3 1693.5,1868.5 v1(1695,1870) ; C13.1 1690,860 v1(1690,857.5) ; C26.1@1697.27,942.73 C26.1 v1(1735,910) ; C28.1 v1(1780,955) ; v1(1750,490) 1804.49,490 1809.49,485 R15.1 ; C35.2 1801.5,1260 1806.5,1265 v1(1855,1265) ; C34.2 1801.5,1325 v1(1860,1325) ; R14.1 v1(1860,1380) ; C31.2 v1(1860,1440) ; C12.1 v1(1855,1495) ; v1(1855,1685) 1907.99,1685 C33.1 ; v1(1910,1425) 1910,1483.5 1915,1488.5 C32.1 ; v1(130.26,1754.74) 135.26,1759.74 v1(130.26,1754.74)
  other v1: 350,100 400,100 450,100 500,100 550,100 700,100 286.7,103.3 306.85,128.16 375,150 425,150 475,150 525,150 311.64,159.8 311.64,191.8 400,200 450,200 500,200 309.87,223.75 124.97,236.24 375,250 425,250 475,250 293.67,251.35 146.87,259.56 283.13,281.56 146.87,291.56 100,300 350,300 400,300 450,300 500,300 296.82,310.48 146.87,323.56 319.45,333.11 475,350 525,350 153.82,354.8 342.08,355.73 399.38,373.91 367.41,375.28 431.26,376.74 173.6,379.95 457.7,394.77 100,400 196.23,402.58 218.86,425.21 241.49,447.83 125,450 175,450 264.11,470.46 286.74,493.09 100,500 150,500 200,500 311.2,513.72 456.2,517.19 341.83,522.97 429.07,534.16 371.39,535.24 125,550 175,550 225,550 275,550 1800,900 1850,900 1900,900 1825,950 1875,950 1800,1000 1850,1000 1900,1000 1775,1050 1825,1050 1875,1050 1800,1100 1850,1100 1900,1100 1775,1150 1825,1150 1875,1150 1850,1200 1900,1200 125,1250 175,1250 225,1250 475,1250 525,1250 150,1300 200,1300 1900,1300 1225,1550 1275,1550 1250,1600 1175,1650 1225,1650 1675,1650 1725,1650 1492.29,1665.8 1524.29,1665.8 1461.06,1672.75 1617.5,1683.9 1438.36,1695.3 100,1700 1200,1700 1250,1700 1700,1700 1750,1700 1800,1700 1635.97,1710.03 1639.2,1741.87 1275,1750 1325,1750 1725,1750 1775,1750 1825,1750 1875,1750 1638.75,1773.87 1441.2,1788.98 100,1800 250,1800 300,1800 350,1800 400,1800 450,1800 500,1800 1250,1800 1300,1800 1350,1800 1400,1800 1700,1800 1750,1800 1800,1800 1850,1800 1900,1800 1641.21,1805.77 1465.94,1809.28 125,1850 175,1850 225,1850 275,1850 325,1850 375,1850 425,1850 475,1850 1275,1850 1325,1850 1375,1850 1775,1850 1825,1850 1875,1850 1556.54,1885.62 100,1900 150,1900 200,1900 250,1900 300,1900 350,1900 400,1900 450,1900 500,1900 1300,1900 1350,1900 1400,1900 1750,1900 1800,1900 1850,1900 1900,1900
  other v2: 924.13,429.13 971.38,429.13 1018.62,429.13 1065.87,429.13 924.13,476.38 1018.62,476.38 1065.87,476.38 924.13,523.62 971.38,523.62 1018.62,523.62 1065.87,523.62 924.13,570.87 971.38,570.87 1018.62,570.87 1065.87,570.87
  other v3: 1471.69,1261.69 1515,1261.69 1558.31,1261.69 1471.69,1305 1515,1305 1558.31,1305 1471.69,1348.31 1515,1348.31 1558.31,1348.31
GPIO0: U4.10 U6.U1 | length 1134
  Top Layer w6: U6.U1 1170.79,549.21 v1(1175,545)
  Top Layer w8: U4.10 1639.21,1255.79 1680,1215 1680,1130 v1(1730,1080)
  Bottom Layer w6: v1(1175,545) 1255,545 1395,685 1395,795 1650,1050 1700,1050 v1(1730,1080)
IO_2: U4.4 U6.A14 | length 1326.5
  Top Layer w6: U6.A14 985.16,329.84 v1(995,320)
  Top Layer w8: v1(1465,555) 1488,578 1488,733.2 1505.16,750.36 U4.4
  Bottom Layer w6: v1(995,320) 1037,278 1168,278 1445,555 v1(1465,555)
IO_3: U4.3 U6.A12 | length 1259.8
  Top Layer w6: U6.A12 1005,371.89 1005,341.11 1046.11,300 v1(1057.5,300)
  Top Layer w8: v1(1465,595) 1465,740.2 1489,764.2 1489,1100.8 1485.47,1104.33 U4.3
  Bottom Layer w6: v1(1057.5,300) 1065.5,292 1162,292 v1(1465,595)
LED_B: R18.2 U6.N1 | length 769.1
  Top Layer w6: U6.N1 1124.8,508 1176.6,508 1202.07,482.53 1667.47,482.53 1730,420 1730,385 1755,360 R18.2
LED_G: R17.2 U6.L1 | length 712.1
  Top Layer w6: U6.L1 1174.64,490.16 1196.27,468.53 1616.47,468.53 1679.49,405.51 R17.2
LED_R: R16.1 U6.J1 | length 795.9
  Top Layer w6: U6.J1 1174.53,470.47 1190.47,454.53 1575.47,454.53 1625,405 1625,265 1689.49,200.51 R16.1
MISO: U4.9 U6.AD10 | length 1000.8
  Top Layer w6: U6.AD10 1023,629.48 1023,723 v1(1025,725)
  Top Layer w8: U4.9 1613.43,1211.57 1650,1175 v1(1650,1150)
  Bottom Layer w6: v1(1025,725) 1400,1100 1600,1100 v1(1650,1150)
MOSI: U4.7 U6.AD18 | length 1292.7
  Top Layer w6: v1(920,700) 945.79,674.21 U6.AD18
  Top Layer w8: U4.7 1564.21,1170.79 1570,1165 v1(1570,1140)
  Bottom Layer w6: v1(920,700) v1@921.11,700 ; v1@926.11,695 v1@921.11,700 ; v1(1570,1140) 975,1140 830,995 830,791.11 v1@921.11,700
NetA1_1: A1.1 C27.2 C29.2 | length 124.2
  Top Layer w16.4: A1.1 A1.1
  Top Layer w22.84: C29.2 1558.5,1740 C27.2 A1.1
NetB1_1: B1.1 U4.20 | length 165.1
  Top Layer w8: U4.20 1524.84,1558.5 B1.1@1524.86,1553.5 ; B1.1@1525.43,1553.5 B1.1@1525.47,1558.5
NetB1_2: B1.2 U4.19 | length 151
  Top Layer w8: U4.19 1544.53,1552.87 B1.2 ; B1.2@1544.53,1557.87 B1.2@1544.53,1558.5
NetB1_3: B1.3 U4.18 | length 158.7
  Top Layer w8: U4.18 1564.21,1552.87 B1.3 B1.3@1564.84,1545.16
NetB1_4: B1.4 L1.2 U4.17 | length 228.2
  Top Layer w8: U4.17 1583.9,1552.87 B1.4 1660.24,1553.5 L1.2
NetB1_7: B1.7 C27.1 | length 57.1
  Top Layer w9: B1.7@1564.84,1621.5 1564.84,1676.85 C27.1@1564.84,1678.35
  Top Layer w16.4: C27.1@1564.84,1676.85 C27.1@1565,1677.01
NetC4_2: C4.2 C5.1 U1.4 | length 176.4
  Top Layer w8: C5.1 C4.2 730.32,1499.21 U1.4
NetC6_2: C6.2 J1.1 U2.2 U2.3 | length 959.7
  Top Layer w8: U2.2 335.16,1398.43 354.61,1378.98 ; U2.3@354.61,1436.06 354.61,1378.98 ; C6.2@355.47,1348.98 354.61,1349.84 354.61,1378.98
  Top Layer w16: C6.2 539.53,1344.53 580,1385 580,1635 685.39,1740.39 J1.1
NetC10_2: C10.2 FB1.2 R11.2 U3.1 | length 227.3
  Top Layer w8: U3.1 U3.1@1048.5,1806.85 ; U3.1@1048.5,1791.85 1048.5,1695 1050,1693.5 1050,1675 FB1.2 C10.2 C10.2@1115,1631.5
NetC15_2: C15.2 U3.4 | length 77.9
  Top Layer w8: U3.4 1199.25,1902.24 C15.2
NetC18_2: C18.2 U4.26 | length 134
  Top Layer w8: C18.2 1339.21,1400 1385,1354.21 U4.26
NetC19_1: C19.1 U4.29 | length 188.7
  Top Layer w8: C19.1 1325,1210 1335,1220 1335,1262.37 1367.78,1295.16 U4.29
NetC23_1: C23.1 U4.21 | length 257.8
  Top Layer w8: C23.1 1470,1565 1470,1555 1505.16,1519.84 U4.21
NetC24_1: C24.1 U4.23 | length 132.1
  Top Layer w8: C24.1@1412.27,1507.27 C24.1 1422.73,1507.27 1465.79,1464.21 U4.23
NetC24_2: C24.2 U4.24 | length 120.8
  Top Layer w8: C24.2@1367.73,1462.73 C24.2 1390.46,1450 1430,1450 1446.1,1433.9 U4.24
NetC28_2: C28.2 U4.6 | length 278.5
  Top Layer w8: U4.6 1544.53,1130.47 1610,1065 1670,1065 C28.2@1705.23,1029.77
NetC30_1: C30.1 C32.2 C33.2 R13.1 | length 178.2
  Top Layer w8: R13.1 1908.5,1555 C32.2 ; C30.1 C33.2 1910,1561.5 C32.2@1908.5,1560
NetC30_2: C30.2 L1.1 R13.2 | length 125.2
  Top Layer w8: L1.1 R13.2 C30.2
NetC36_1: C36.1 U6.A23 X2.3 | length 329.7
  Top Layer w6: X2.3 669.09,165 C36.1 720,165.47 720,190 886.73,356.73 U6.A23
NetC37_2: C37.2 U6.B5 | length 182.6
  Top Layer w6: U6.B5 1073.74,386.26 1130,330 1130,275 1125,270 C37.2
NetC38_1: C38.1 U6.A18 | length 220.4
  Top Layer w6: U6.A18 945.79,348.31 942,344.53 942,318 970,290 1025,290 1060,255 C38.1 1060.47,244.06 C38.1@1070,244.06
NetC39_1: C39.1 U6.B24 X2.1 | length 343.2
  Top Layer w6: X2.1 624.53,225.71 C39.1 720,275 836.73,391.73 U6.B24
NetC40_2: C40.2 U6.D2 X3.1 | length 420.5
  Top Layer w6: U6.D2 1107.84,416.69 1107.84,377.16 1245.83,239.17 X3.1 1330.05,200.05 C40.2@1330.05,199.38
NetC42_2: C42.2 U6.C1 | length 124.7
  Top Layer w6: U6.C1 1199.06,411.42 C42.2
NetC44_2: C44.2 U6.F2 X3.2 | length 446.2
  Top Layer w6: U6.F2 1112.41,440.94 1116.98,436.37 1320,436.37 1438.76,317.61 X3.2@1438.76,315.83 ; X3.2 X3.2@1438.76,315.83 ; C44.2 X3.2@1438.76,315.83
NetC45_1: C45.1 U6.D23 | length 215.3
  Top Layer w6: C45.1 750,330 835,415 859.94,415 860.25,414.69 873.85,414.69 880.42,421.26 U6.D23
NetC46_2: C46.2 U6.E24 | length 176.6
  Top Layer w6: C46.2 785.2,385 831.3,431.1 U6.E24
NetC49_2: C49.2 L2.1 U6.H23 | length 191
  Top Layer w6: C49.2@740,454.53 740.47,454.06 873.85,454.06 880.42,460.63 U6.H23
  Top Layer w16.4: L2.1 699.33,454.53 C49.2@740,454.53
NetC50_1: C50.1 U6.N24 | length 144.5
  Top Layer w6: C50.1 780,575 845.16,509.84 U6.N24
NetC52_2: C52.2 U6.AC5 | length 150.6
  Top Layer w6: U6.AC5 1088.27,608.27 1095,615 1145,615 C52.2
NetD1_1: D1.1 R9.1 | length 55.2
  Top Layer w8: D1.1 429.49,1723.98 R9.1
NetD1_2: D1.2 U2.9 | length 118.5
  Top Layer w8: U2.9 374.53,1664.45 D1.2 D1.2@375,1669.92
NetD2_1: D2.1 R10.1 | length 54.5
  Top Layer w8: D2.1@525,1508.98 R10.1@525,1563.46
NetD2_2: D2.2 U2.7 | length 67.3
  Top Layer w8: U2.7 465.95,1503.82 D2.2@470,1503.82
NetD3_1: D3.1 R16.2 | length 65.4
  Top Layer w6: R16.2 1814.53,165 D3.1@1815.04,165.51
  Top Layer w8: D3.1@1815.04,165.51 D3.1
NetD3_3: D3.3 R18.1 | length 77.6
  Top Layer w8: R18.1 1870.51,288.07 D3.3
NetD3_4: D3.4 R17.1 | length 77.1
  Top Layer w8: R17.1@1741.46,284.06 R17.1 1813.5,285 1814.02,285.51 D3.4
NetR1_1: R1.1 U1.10 | length 86.3
  Top Layer w8: U1.10 873.39,1241.1 R1.1
NetR2_1: R2.1 U1.9 | length 165.4
  Top Layer w8: U1.9 769.69,1185.31 780,1175 874.49,1175 R2.1@875,1175
NetR3_2: R3.2 U2.14 | length 103.2
  Top Layer w8: R3.2@203.98,1535 R3.2 205.51,1530 230,1530 256.18,1503.82 U2.14
NetR4_2: R4.2 U2.15 | length 86
  Top Layer w8: R4.2@205.51,1473.98 240,1473.98 250.16,1484.13 U2.15
NetR5_2: R5.2 U2.16 | length 102.2
  Top Layer w8: R5.2 R5.2@210,1413.98 ; R5.2@215,1413.98 265.47,1464.45 U2.16
NetR6_2: R6.2 U1.3 | length 165.8
  Top Layer w8: U1.3 750,1450 R6.2 R6.2@818.42,1513.43
NetR7_1: R7.1 U2.12 | length 147.5
  Top Layer w8: R7.1@230,1663.46 230.51,1663.46 315.47,1578.5 U2.12
NetR8_2: R8.2 U2.1 | length 98.1
  Top Layer w8: R8.2 315.47,1395.47 U2.1
NetR11_1: R11.1 U3.3 | length 117.3
  Top Layer w8: R11.1@1111.5,1695 1111.5,1726.5 1122.4,1737.4 U3.3
NetR12_2: R12.2 U4.30 | length 217.2
  Top Layer w8: R12.2 1310,1150 1355,1195 1355,1255 1375.47,1275.47 U4.30
NetR14_2: R14.2 U4.14 | length 138.9
  Top Layer w8: U4.14 1688.03,1334.53 R14.2
NetR15_2: R15.2 SW1.1 | length 125.3
  Top Layer w6: R15.2 1876.3,490.79 SW1.1
NetSW1_2: SW1.2 U6.R1 | length 603.5
  Top Layer w6: U6.R1 1123.65,529.53 1131.18,522 1182.4,522 1207.87,496.53 1481.53,496.53 1600,615 SW1.2
NetU4_32: U4.32 X1.3 | length 214.2
  Top Layer w8: X1.3 1359,1145.14 1359,1169 1380,1190 1380,1230 1386.1,1236.1 U4.32
OCP_N: U1.7 U6.AD20 | length 694.5
  Top Layer w6: v1(890,700) 890,695 926.1,658.9 U6.AD20
  Top Layer w8: v1(730,1090) 730,1240.79 U1.7
  Bottom Layer w8: v1(730,1090) 730,995 780,945 780,810 v1(890,700)
R\S\T\: U4.2 U6.A10 | length 1202.9
  Top Layer w6: U6.A10 1024.53,341.38 1043.91,322 1066.61,322 1073.61,315 v1(1105,315)
  Top Layer w8: v1(1435,645) 1435,730 1475,770 1475,1095 1465.79,1104.21 U4.2
  Bottom Layer w6: v1(1105,315) 1160,315 1435,590 v1(1435,645)
RESET: C63.2 P1.10 R19.2 U6.AC13 U6.AD12 | length 1229.3
  Top Layer w6: 490,1115.51 460,1085.51 460,905 490,875 880,875 935,820 v1(1000,820) ; v1(985,715) 985,714.68 1004.84,694.84 U6.AD12 1004.84,625.84 995,616 U6.AC13
  Top Layer w8: C63.2 404.49,1115 R19.2 490,1115.51 544.49,1115.51 P1.10
  Bottom Layer w6: v1(985,715) 985,805 v1(1000,820)
RF: C47.2 C48.2 L2.2 L3.1 | length 167.5
  Top Layer w16.4: L3.1@463.86,454.53 575,454.53 575.47,455 L2.2
SCLK: U4.8 U6.AD16 | length 1307.1
  Top Layer w6: v1(925,730) 925,728.89 949,704.89 949,690.8 965.47,674.33 U6.AD16
  Top Layer w8: U4.8 1583.9,1176.1 v1(1610,1150)
  Bottom Layer w6: v1(925,730) 850,805 850,995 973,1118 1579.11,1118 1610,1148.89 v1(1610,1150)
SWDCLK: P1.4 U6.AA24 | length 614.4
  Top Layer w6: v1(795,630) 836.42,588.58 U6.AA24
  Bottom Layer w6: P1.4 545,960.25 513,928.25 513,872.2 580.2,805 680,805 780,705 780,686.11 778,684.11 778,647 v1(795,630)
SWDIO: P1.2 U6.AC24 | length 505.2
  Top Layer w4: v1(800,675) v1@800,675.32
  Top Layer w6: v1@800,675.32 U6.AC24
  Bottom Layer w6: P1.2 545,860 580,825 690,825 800,715 v1(800,675)
SWO: P1.8 U6.AD22 | length 914.3
  Top Layer w6: v1(845,710) 845,708.38 906.42,646.97 U6.AD22
  Bottom Layer w6: P1.8 510,1100 510,1145 550,1185 650,1185 690,1145 690,1005 750,945 750,805 v1(845,710)
VBUS: C3.2 C56.2 CONN1.1 U2.13 U6.AD2 | length 2248.8
  Top Layer w6: U6.AD2 1120,644.69 1120,670 C56.2
  Top Layer w8: 245,1565.42 245,1545 266.5,1523.5 U2.13 ; C3.2@254.53,885 315,885 350,850 495,850 520,825 900,825 935,790 1078.24,790 C56.2
  Top Layer w10: 225.71,856.18 229.53,860 ; 245,1565.42 190.42,1620 105,1620 66,1581 66,1154 205,1015 205,935.47 C3.2
  Top Layer w16: CONN1.1 225.71,856.18 ; 229.53,860 C3.2@254.53,885
VCC: C1.2 C2.2 C7.2 R9.2 R10.2 U1.2 U2.5 U2.10 U2.11 | length 1305
  Top Layer w8: v1(293.27,1746.73) 255.88,1709.34 C7.2 290,1675 290,1626.6 312.63,1603.98 ; U2.11 335.16,1581.45 312.63,1603.98 ; U2.10 354.84,1583.82 334.68,1603.98 312.63,1603.98 ; U2.5 402.68,1457.32 v1(455,1405) ; R9.2 476.54,1663.46 v1(478.27,1661.73) ; R10.2@525,1624.49 523.27,1626.22 v1(523.27,1701.73) 563.27,1701.73 v1(565,1700) ; U1.2 769.69,1439.69 789.68,1459.69 C1.2@852.3,1459.69 ; C1.2@852.3,1453.2 C1.2@854.1,1455 ; C1.2@852.3,1455 C1.2@854.1,1455 ; v1(935,1570) 935,1535.9 C2.2 C1.2@854.1,1455
  Bottom Layer w8: v1(565,1700) 805,1700 v1(935,1570)
VCC_RDO: C11.2 C12.2 C13.2 C14.2 C16.1 C17.1 C20.2 C21.2 C22.2 C25.2 C26.2 C31.1 C34.1 C35.1 U3.5 U4.1 U4.5 U4.12 U4.13 U4.15 U4.22 U4.25 U4.27 U4.28 X1.4 | length 2588.8
  Top Layer w8: v1(925,1900) 968.5,1900 C11.2 ; C11.2@970,1902.24 U3.5 ; v1(1175,1335) 1241.5,1335 C17.1 C16.1 1348.19,1331.5 ; v1(1190,955) 1225.35,955 1260,989.65 1260,1075 1247.52,1087.48 X1.4 ; v1(1301.5,1505) 1305,1501.5 1301.5,1497.99 C20.2 1306.84,1455 1387.94,1373.9 U4.25 ; v1(1330,1545) 1367.73,1582.73 C22.2 1400,1555 1440,1555 1485.47,1509.53 U4.22 ; U4.28 1364.84,1314.84 1348.19,1331.5 ; U4.27 1358.03,1334.53 1355,1331.5 1348.19,1331.5 ; C25.2 C25.2@1435,996.5 ; U4.1 1431.57,1206.57 1375,1150 1375,990 1428.5,990 C25.2@1435,996.5 ; v1(1450,1045) 1435,1030 C25.2@1435,996.5 ; U4.5 1524.84,1120.16 C26.2 1607.73,947.27 C13.2 1607.27,942.27 v1(1570,905) ; U4.12 1644.84,1295.16 1675,1265 C35.1 ; U4.13 1690.97,1314.84 1696.13,1320 C34.1 C35.1 ; U4.15 1644.21,1354.21 C31.1@1731.75,1441.75 ; v1(1670,1495) C12.2 C31.1 ; v1(1750,1205) 1733.5,1221.5 C35.1
VDD: C8.2 C9.2 C41.2 C43.2 C51.2 C53.2 C54.2 C55.2 C57.2 C58.2 C59.2 C60.2 C61.2 C62.2 D3.2 FB1.1 P1.1 R1.2 R2.2 R19.1 U6.A22 U6.AD14 U6.AD23 U6.B1 U6.W1 U6.Y2 | length 2359.1
  Top Layer w6: U6.A22 906.42,315 895,303.58 C60.2 949.53,244.53 C41.2 1004.53,245 C61.2 ; v1(955,730) 955,718.69 963,710.69 963,705.89 975.89,693 977,693 985.16,684.84 U6.AD14 ; C8.2@1048.5,1450 C8.2 C9.2 1048.5,1567.01 FB1.1 ; U6.Y2 1105.38,578.74 1116.64,590 1180,590 1225,635 C54.2
  Top Layer w8: v4@405,1005 R19.1 ; P1.1 v1(660,915) ; v1(725,700) 685,740 C53.2 C57.2 C59.2 715,630 784.53,699.53 815.16,699.53 U6.AD23 ; v1(840,245) 894.53,245 C60.2 ; R1.2 944.49,1300.51 v1(945,1300) ; R2.2@935.51,1175 v1(1000,1175) ; v1(960,845) 960,860.47 C62.2 C58.2 C55.2 1084.53,900.47 v1(1085,900) ; C8.2@1048.5,1450 1050,1448.5 v1(1050,1395) ; U6.B1 1194.18,320.5 C43.2 1233.4,290.76 v1(1250,274.17) ; U6.W1 1123.06,569 1184.94,569 1185.04,568.9 1233.9,568.9 C51.2@1235,570 ; v1(1235.47,519.53) C51.2 ; C54.2 1275.47,665.47 v1(1305,695) ; D3.2 1875,165.47 v1(1875,100)
  Bottom Layer w8: v1(955,730) 955,792.53 960,797.53 v1(960,845)
  other v4: 405,1000
pads on no net: CONN1.0 CONN1.4 J1.3 J1.4 P1.6 P1.7 U1.1 U1.5 U1.8 U2.17 U4.16 U4.31 U5.2 U5.3 U5.4 U6.A8 U6.A16 U6.A20 U6.AB2 U6.AC9 U6.AC11 U6.AC15 U6.AC17 U6.AC19 U6.AC21 U6.B3 U6.B9 U6.B11 U6.B13 U6.B15 U6.B17 U6.B19 U6.G1 U6.H2 U6.J24 U6.K2 U6.L24 U6.M2 U6.P2 U6.P23 U6.R24 U6.T2 U6.T23 U6.U24 U6.V23 U6.W24 U6.Y23 X1.1 X1.5
copper on no net:
  other v3: 345,1493.98

## Polygon pours and split planes (outlines as drawn)
GND on Bottom Layer "GND_L04_P024" (solid, remove dead copper, pour order 24): 50,1950 50,1200 600,1200 600,1950
GND on Bottom Layer "GND_L04_P022" (solid, remove dead copper, pour order 22): 50,50 50,600 800,600 800,50
GND on Bottom Layer "GND_L04_P010" (solid, remove dead copper, pour order 10): 900,1950 900,1700 1125,1700 1125,825 1950,825 1950,1950
GND on Top Layer "GND_L01_P012" (solid, remove dead copper, pour order 12): 50,1950 50,1200 600,1200 600,1950
GND on Top Layer "GND_L01_P020" (solid, remove dead copper, pour order 20): 50,50 50,600 800,600 800,50
GND on Top Layer "GND_L01_P008" (solid, remove dead copper, pour order 8): 900,1950 900,1700 1125,1700 1125,825 1130,825 1950,825 1950,1950
GND on Internal Plane 1 (split plane): 1979.9,20.1 20.1,20.1 20.1,1979.9 1979.9,1979.9
VCC_RDO on Internal Plane 2 (split plane): 1979.9,835.09 1135.09,835.09 1135.09,1700 1134.74,1702.61 1133.73,1705.04 1132.13,1707.13 1130.04,1708.73 1127.61,1709.74 1125,1710.09 910.09,1710.09 910.09,1979.9 1979.9,1979.9
VDD on Internal Plane 2 (split plane): 889.91,1700 890.26,1697.39 891.26,1694.96 892.87,1692.87 894.96,1691.27 897.39,1690.26 900,1689.91 1114.91,1689.91 1114.91,825 1115.26,822.39 1116.27,819.96 1117.87,817.87 1119.96,816.26 1122.39,815.26 1125,814.91 1979.9,814.91 1979.9,20.1 20.1,20.1 20.1,1189.91 600,1189.91 602.61,1190.26 605.04,1191.27 607.13,1192.87 608.74,1194.96 609.74,1197.39 610.09,1200 610.09,1979.9 889.91,1979.9
VCC on Internal Plane 2 (split plane): 589.91,1210.09 20.1,1210.09 20.1,1979.9 589.91,1979.9

## Keep-outs
Keep-Out Layer:
  lines w10: 50,50 1950,50 1950,1950 50,1950 50,50

## Other copper
Bottom Layer:
  pour cut-out: -1000,2000
  pour cut-out: -1000,2000
Internal Plane 2 (plane layer: these items are gaps in the copper):
  lines w20: 0,1200 600,1200 600,2000 ; 900,2000 900,1700 1125,1700 1125,825 2000,825

## Silkscreen, mask and mechanical layers (free items; w line width, h text height)
Top Overlay:
  drawing of 818 lines, arcs and shapes, not listed
  text "Goverdhan" at 75,575 h40
  text "Sitara Rev.1" at 75,525 h40
  text "04/10/2017" at 75,475 h40
  text "AL" at 1900,50 h60
Mechanical 3:
  the board outline again, w10

## Dimensions
50,50 to 1950,50 on Mechanical 1
50,50 to 50,1950 on Mechanical 1